# Altium PCB TIDA-00643_PCB.PcbDoc (part 2 of 3)
Units mil, origin at the board's own origin, x right, y up, seen from the top; angles counter-clockwise.
Board outline 1000 x 2200 mil, 2 copper layers (Top Layer, Bottom Layer), stack 62 mil thick; 94 components, 77 nets, 320 pads, 233 vias.
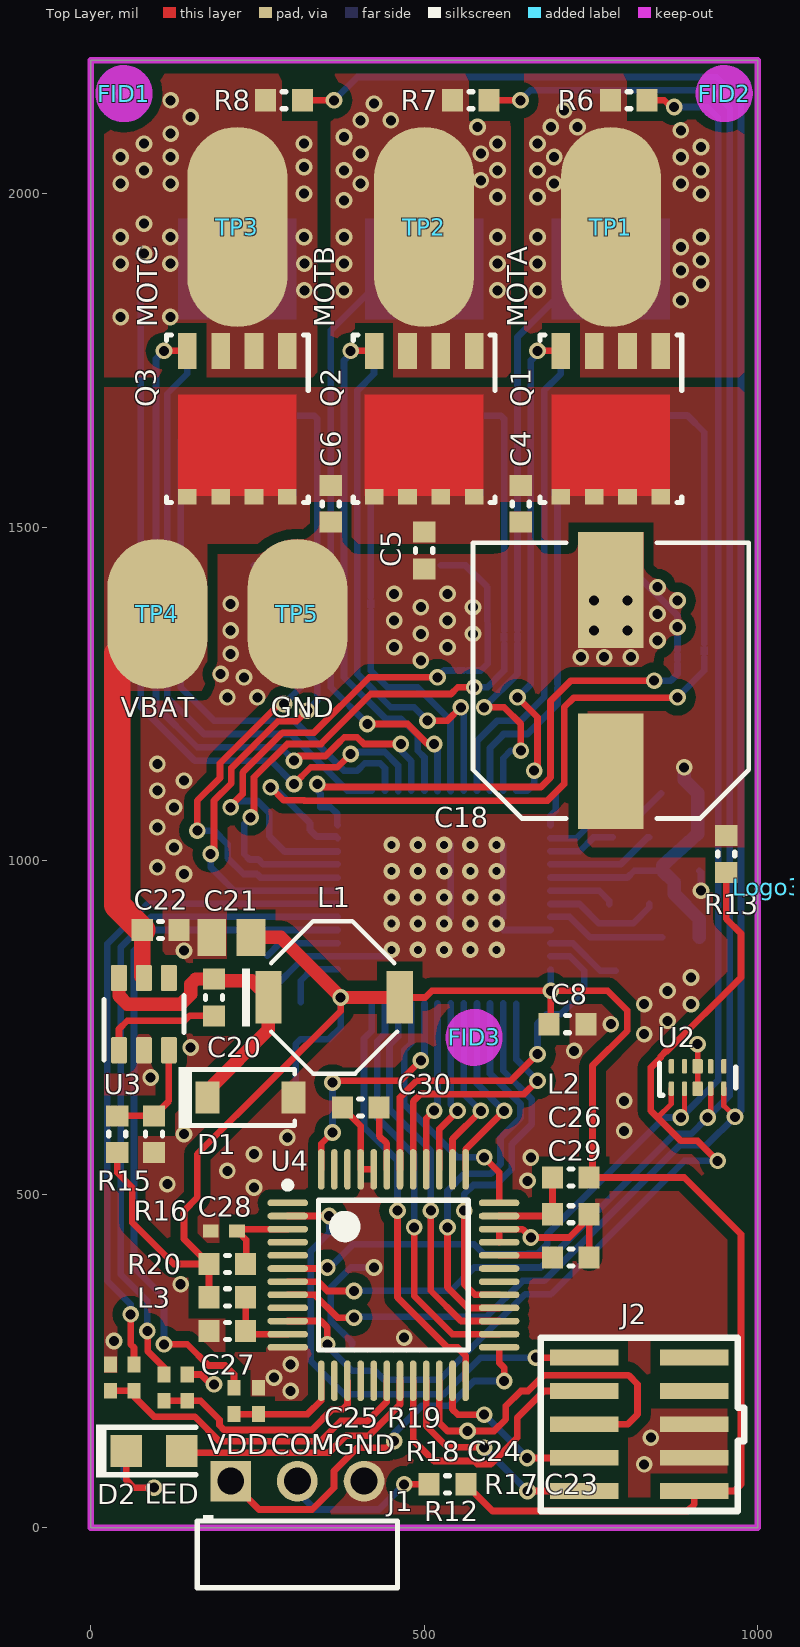
[diagram p0: Top Layer view]

## Via types
v1: diameter 25, hole 15, Top Layer to Bottom Layer, tented both sides, 208 vias
v2: diameter 25, hole 12, Top Layer to Bottom Layer, tented top, 25 vias

## Nets (pads, with @x,y where several pads share a name; then routed paths per layer and width w, separated by ;. In a path a pad name is that pad's centre, name@x,y a point inside that pad or via, vN(x,y) a via of type N, cw(c..) or ccw(c..) an arc to the next point about the centre after c; other vN are vias at no path point) (continued)
GND: (continued)
  Bottom Layer w10: R5.1@245,1442.8 315,1372.8 NT12.2@315,1300 ; C1.1@265,802.44 267.44,802.44 321.73,856.73 441.42,856.73 U1.49@451.26,866.57 ; C19.2@391.79,274.69 391.79,278.21 360,310 360,360 390,390 v1(425,390) ; R4.1@525,1442.8 562.2,1442.8 594.89,1410.11 595.2,1305 595.2,1295.2 585,1285 NT11.2@565,1285 ; U1.49@539.84,914.45 U1.49@539.84,1025.16 ; U1.49@608.74,905.94 618.58,896.1 U1.45@689.45,896.1 ; U1.49@618.58,914.45 U1.49@618.58,1023.58 ; R3.1@805,1442.8 880,1367.8 NT10.2@880,1315 ; C9.2@912.56,985 915,982.56 v1(915,955)
  other v1: 830,95 840,135 300,205 275,225 300,245 35,280 470,285 135,365 245,510 115,515 655,520 205,535 660,555 245,560 295,585 140,590 800,595 800,640 90,675 725,715 150,720 830,740 780,755 865,760 830,785 900,785 865,805 900,825 140,865 140,980 100,990 125,1020 100,1050 125,1080 100,1105 140,1120 100,1145 205,1245 250,1245 230,1275 195,1280 495,1300 735,1305 770,1305 810,1305 210,1310 455,1320 535,1320 850,1330 495,1340 573.31,1340 210,1345 755,1345 805,1345 880,1350 455,1360 535,1360 850,1370 495,1380 573.31,1380 210,1385 755,1390 805,1390 880,1390 455,1400 535,1400 850,1410
  other v2: 451.26,866.26 490.63,866.26 530,866.26 569.37,866.26 608.74,866.26 451.26,905.63 490.63,905.63 530,905.63 569.37,905.63 608.74,905.63 451.26,945 490.63,945 530,945 569.37,945 608.74,945 451.26,984.37 490.63,984.37 530,984.37 569.37,984.37 608.74,984.37 451.26,1023.74 490.63,1023.74 530,1023.74 569.37,1023.74 608.74,1023.74
INH_A: U1.2 U4.29 | length 559.1
  Top Layer w10: v1(560,475.31) 560,365.31 576.12,349.2 U4.29@612.46,349.2
  Bottom Layer w10: v1(560,475.31) 560,500 573.81,513.81 607.19,513.81 631.5,538.13 631.5,575 661.5,605 661.5,642.19 618.58,685.11 U1.2@618.58,785.87
INH_B: U1.4 U4.37 | length 289.5
  Top Layer w10: U4.37@562.27,537.19 562.27,567.27 v1(620,625)
  Bottom Layer w10: U1.4@579.21,785.87 579.21,665.79 v1(620,625)
INH_C: U1.6 U4.39 | length 264.1
  Top Layer w10: U4.39@522.9,537.19 522.9,597.9 v1(550,625)
  Bottom Layer w10: U1.6@539.84,785.87 539.84,635.16 v1(550,625)
INL_A: U1.3 U4.28 | length 603.1
  Top Layer w10: v1(535,450.31) 535,360.31 565.8,329.51 U4.28@612.46,329.51
  Bottom Layer w10: v1(535,450.31) 535,505 560.81,530.81 600.15,530.81 614.5,545.17 614.5,584.5 644.5,614.5 644.5,635.15 598.9,680.75 U1.3@598.9,785.87
INL_B: U1.5 U4.38 | length 276.8
  Top Layer w10: U4.38@542.58,537.19 542.58,582.58 v1(585,625)
  Bottom Layer w10: U1.5@559.53,785.87 559.53,650.47 v1(585,625)
INL_C: U1.7 U4.40 | length 255.9
  Top Layer w10: U4.40@503.21,537.19 503.21,613.53 v1(515,625.31)
  Bottom Layer w10: v1(515,625.31) 520.16,630.47 520.16,785.87 U1.7@520,785.71
ISEN_A: R17.2 U1.16 | length 1071
  Top Layer w10: v1(110,275) 145,275 176.69,243.31 201.69,243.31 215,230 R17.2@215,209.69
  Bottom Layer w10: v1(110,275) 110,345 65,390 65,865 96.1,896.1 U1.16@370.55,896.1
ISEN_B: R18.2 U1.17 | length 1011
  Top Layer w10: v1@85.5,294.5 85.5,264.85 110,240.35 110,231.65 R18.2@110,229.69
  Bottom Layer w10: v1(85,295) 85,340 45,380 45,870 90.79,915.79 U1.17@370.55,915.79
ISEN_C: R19.2 U1.18 | length 1017.5
  Top Layer w10: v1(60,320) 60,275 65,270 R19.2@65,244.69
  Bottom Layer w10: v1(60,320) 60,335 25,370 25,875 85.47,935.47 U1.18@370.55,935.47